# Altium PCB PowerFK2.PcbDoc
Units mm, origin at the board's own origin, x right, y up, seen from the top; angles counter-clockwise.
Board outline 152.4 x 101.6 mm, 2 copper layers (Top Layer, Bottom Layer); 31 components, 21 nets, 89 pads, 0 vias.
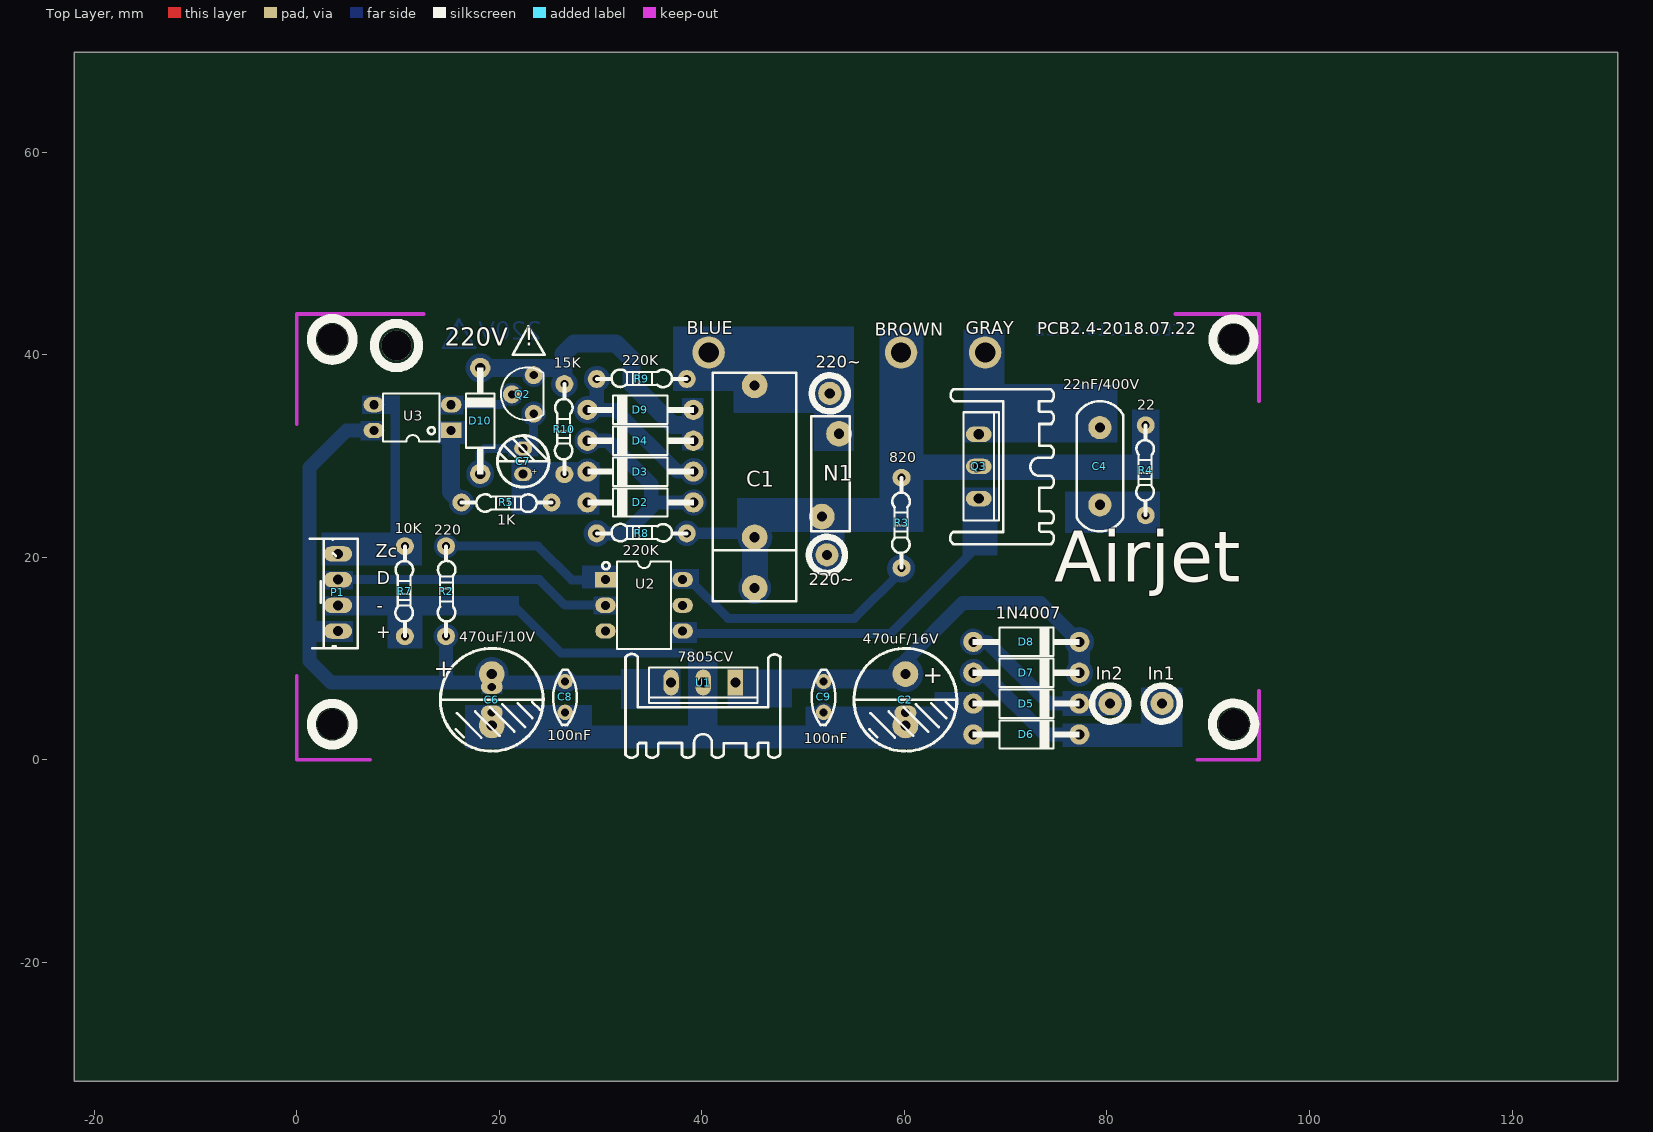
[diagram p0: Top Layer view]
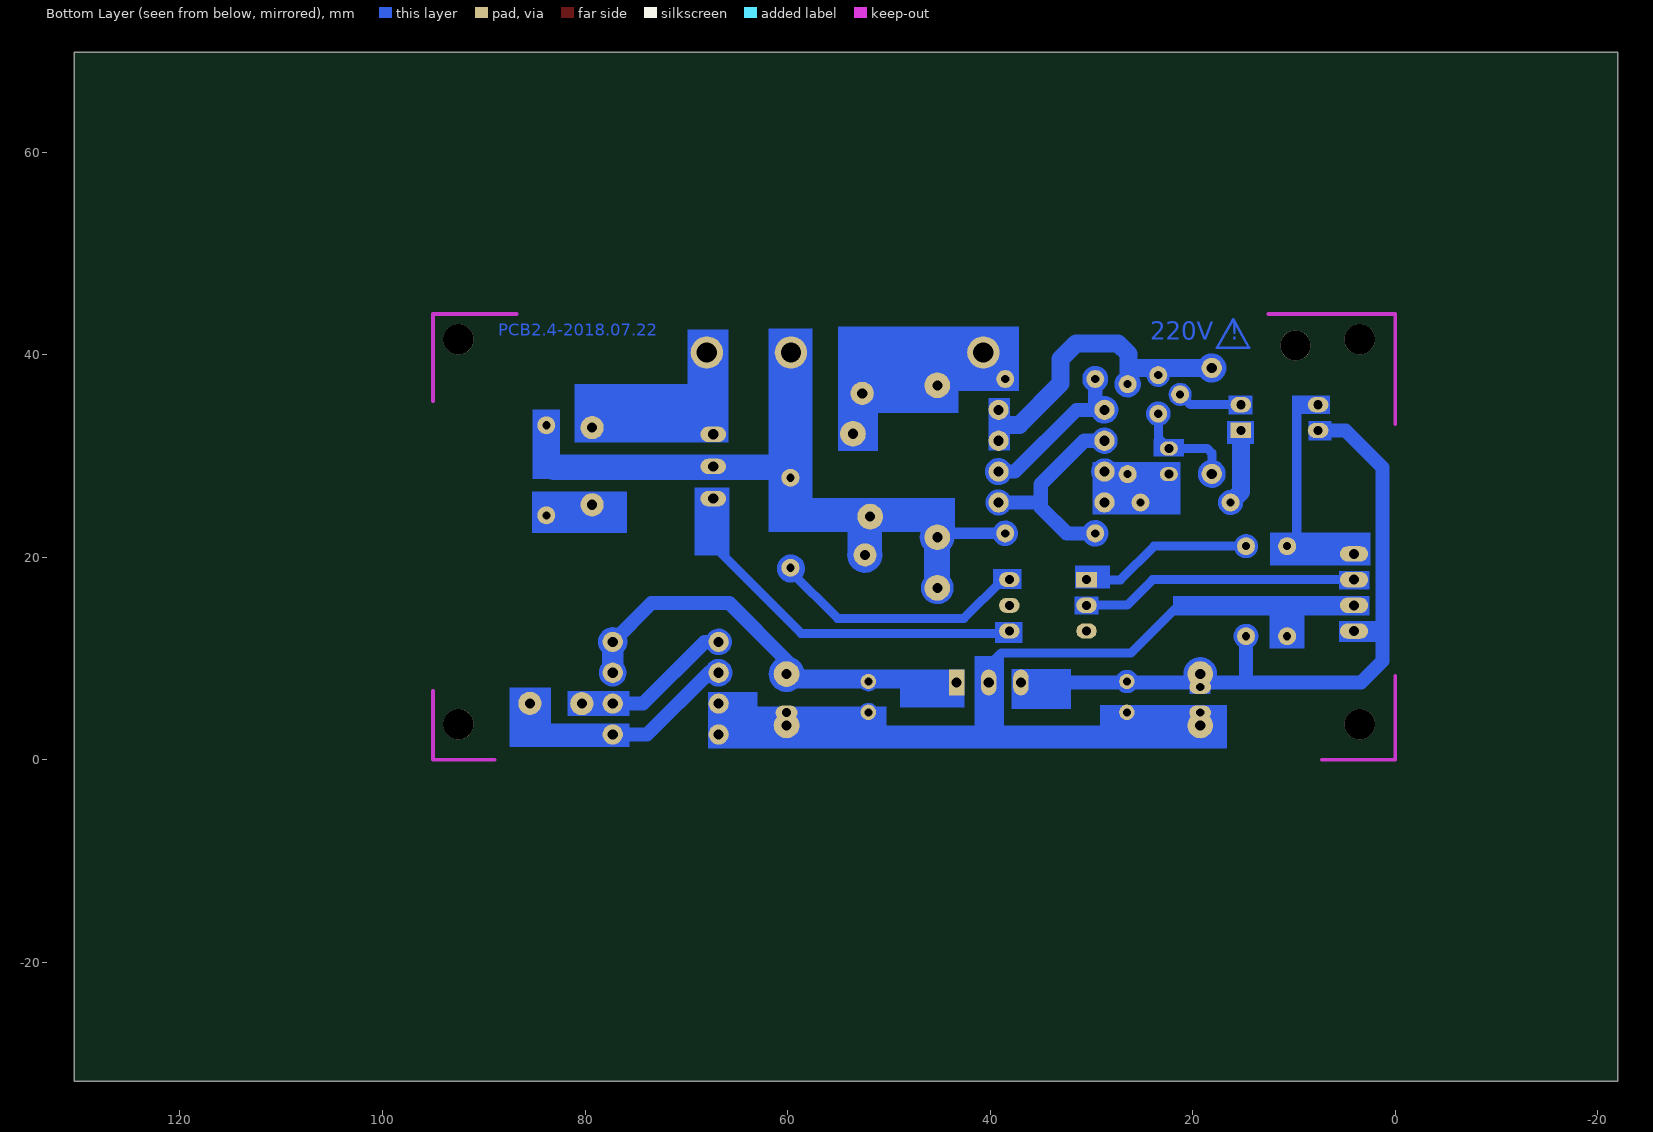
[diagram p1: Bottom Layer view, seen from below]

## Layer stack, top to bottom
Top Solder: solder mask 0.0102, Solder Resist, Dk 3.5
Top Layer: signal copper 0.0356
Dielectric1: dielectric 0.32, FR-4, Dk 4.8
Bottom Layer: signal copper 0.0356
Bottom Solder: solder mask 0.0102, Solder Resist, Dk 3.5

## Board outline
-21.971,-31.75 130.429,-31.75 130.429,69.85 -21.971,69.85

## Design rules (kind name [scope] priority, off if disabled: settings)
Clearance [All] p1: gap=0.254
FabricationTestPointUsage TestPointUsage [All] p1: valid=0 allowmultiple=FALSE
FabricationTestpoint Testpoint [All] p1: side=3 testpointundercomponent=TRUE minsize=1.016 maxsize=2.54 preferedsize=1.524 minholesize=0 maxholesize=1.016 preferedholesize=0.813 testpointgrid=0.025 allowsidetop=TRUE allowsidebottom=TRUE usegrid=TRUE gridtolerance=0
PolygonConnect [All] p1: connectstyle=Relief reliefconductorwidth=0.254 reliefentries=4 polygonreliefangle="90 Angle" airgapwidth=0.254
RoutingVias [All] p1: holewidth=0.711 width=1.27 viastyle="Through Hole" minholewidth=0.711 minwidth=1.27 maxholewidth=0.711 maxwidth=1.27
SolderMaskExpansion [All] p1: expansion=0.102
Width [All] p1: maxlimit=5.08 minlimit=0.254 preferedwidth=0.889 toplayer_maxwidth=0.254 toplayer_prefwidth=0.254 minimp=50.000000 maximp=50.000000 favimp=50.000000
27 further rules are at their usual default settings.

## Components (designator, comment, footprint, x,y, rotation, side; value= is the part's Value field where it differs from the comment)
C1 "220nF/300V" Cap15-20 45.212,29.464 r270 top
C2 "470uF/16V" RB.2/.4 60.096,8.458 r270 top
C4 "22nF/400V" Cap10 79.299,28.981 r270 top
C6 "470uF/10V" RB.2/.4 19.253,8.458 r270 top (schematic designator C2)
C7 "10uF/50V" RB.1/.2 22.352,29.464 r90 top
C8 "100nF" RAD0.12 26.492,4.674 r90 top (schematic designator C3)
C9 "100nF" RAD0.12 52.019,4.674 r90 top (schematic designator C3)
D2 "1N4007" DIODE0.4 33.934,25.4 r180 top
D3 "1N4007" DIODE0.4 33.934,28.448 r180 top
D4 "1N4007" DIODE0.4 33.934,31.496 r180 top
D5 "1N4007" DIODE0.4 72.034,5.537 r0 top (schematic designator D1)
D6 "1N4007" DIODE0.4 72.034,2.489 r0 top (schematic designator D2)
D7 "1N4007" DIODE0.4 72.034,8.585 r0 top (schematic designator D3)
D8 "1N4007" DIODE0.4 72.034,11.633 r0 top (schematic designator D4)
D9 "1N4007" DIODE0.4 33.934,34.544 r180 top
D10 "1N4007" DIODE0.4 18.11,33.452 r90 top
N1 "10D471K" VARISTOR-10MIL 51.841,24.003 r90 top
P1 "Header 4" CON4 4.064,12.7 r0 top
Q2 "C945" TO92BS2 22.758,36.068 r270 top
Q3 "Triac" TO-220HS28#1 67.335,28.956 r270 top
R2 "220" RES0.35 14.732,12.192 r90 top
R3 "820" RES0.35 59.715,27.838 r270 top
R4 "22" RES0.35 83.82,33.02 r270 top
R5 "1K" RES0.35 16.256,25.4 r0 top
R7 "10K" RES0.35 10.668,21.082 r270 top
R8 "220K" RES0.35 38.506,22.352 r180 top
R9 "220K" RES0.35 38.506,37.592 r180 top
R10 "15K" RES0.35 26.416,37.084 r270 top
U1 "7805CV" TO-220HS28#2 40.132,7.62 r180 top (schematic designator Q2)
U2 "MOC3021" DIP6 30.48,17.78 r270 top
U3 "PC817" DIP4-OPTO 15.24,32.512 r90 top

## Footprints (in the part's own frame and the unit in brackets; to place one, negate y for a bottom-side part, rotate by r counter-clockwise, add the part's x,y. Pads: shape width x height; smd on the part's side, far side on the other; paste and mask are expansions set on the pad)
Cap10 [mil]
  round 90 hole 39.37: 1(-150,0) 2(150,0)
  silkscreen extent -253,-91 254,91
Cap15-20 [mm]
  round 2.54 hole 1: 1(7.5,0) 1(12.5,0) 2(-7.5,0)
  silkscreen extent -8.76,-4.14 13.82,4.11
CON4 [mil] "100mil between pins"
  oval 110x60 hole 39.37: 1(0,0) 2(0,100) 3(0,200) 4(0,300)
  silkscreen extent -110,-67 77,358
DIODE0.4 [mm] "Diode, Axial; Body 5.2 x 2.7 mm (LxDia. max), Lead Dia. 0.86 mm (max)"
  round 2 hole 1: 1(-5.23,0) 2(5.23,0)
  silkscreen extent -5.3,-1.4 5.25,1.4
DIP4-OPTO [mm] "DIP; 4 Leads; Row Spacing 7.62 mm; Pitch 2.54 mm"
  rect 1.524x2.032 hole 0.9: 1(0,0)
  oval 1.524x2.032 hole 0.9: 2(2.54,0)
  oval 1.5x2.032 hole 0.9: 3(2.54,7.62) 4(0,7.62)
  silkscreen extent -1.1,1.16 3.63,6.73
DIP6 [mm] "DIP; 6 Leads; Row Spacing 7.62 mm; Pitch 2.54 mm"
  rect 1.524x2.032 hole 0.9: 1(0,0)
  oval 1.524x2.032 hole 0.9: 2(2.54,0)
  oval 1.5x2.032 hole 0.9: 3(5.08,0) 4(5.08,7.62) 5(2.54,7.62) 6(0,7.62)
  silkscreen extent -1.78,-0.3 6.86,6.46
RAD0.12 [mil]
  round 60 hole 31.5: 1(0,0) 2(120,0)
  silkscreen extent -49,-45 166,46
RB.1/.2 [mil]
  oval 55x70 hole 35.43: 1(-50,0) 2(50,0)
  silkscreen extent -100,-100 100,100
RB.2/.4 [mm]
  round 2.54 hole 1: 1(0,0) 2(5.08,0)
  silkscreen extent -2.54,-5.08 7.62,5.08
RES0.35 [mil] "Diode, Axial; Body 5.2 x 2.7 mm (LxDia. max), Lead Dia. 0.86 mm (max)"
  round 70 hole 31.5: 1(0,0)
  round 70 hole 31.5 paste+0: 2(350,0)
  silkscreen extent 0,-37 350,32
TO92BS2 [mil] "NPN-CC5551,C945 Base Side"
  round 70 hole 31.5: 1(-75,25) 2(0,-60) 3(75,25)
  silkscreen extent -105,-102 100,63
TO-220HS28#1 [mm] "MOSFET-IRF4905- Z46n"
  oval 1.524x2.54 hole 1: 1(-3.175,0) 2(0,0) 3(3.175,0)
  silkscreen extent -7.63,-2.82 7.68,7.42
TO-220HS28#2 [mm] "MOSFET-IRF4905- Z46n"
  rect 1.524x2.54 hole 1: 1(-3.175,0)
  oval 1.524x2.54 hole 1: 2(0,0) 3(3.175,0)
  silkscreen extent -7.63,-2.82 7.68,7.42
VARISTOR-10MIL [mm]
  round 2.54 hole 1: 1(0,0) 2(8.179,-1.702)
  silkscreen extent -1.43,-2.77 9.91,1.04

## Part data
C1: library part CAP, "Capacitor"
C2 C6: library part "Cap Pol1", "Polarized Capacitor (SMD)"
C4: library part Cap, "Capacitor"
C7: library part "Cap Pol", "Polarized Capacitor"
C8 C9: library part Cap, "Capacitor np"
D2 D3 D4 D9 D10: library part Diode
D5 D6 D7 D8: library part Diode, "1 Amp General Purpose Rectifier"
N1: library part "Res Varistor", "Varistor (Voltage-Sensitive Resistor)"
P1: "Header, 4-Pin"
Q2 U1: library part BC337, "NPN General Purpose Amplifier"
Q3: "Silicon Bidirectional Triode Thyristor"
R2 R3 R4 R5 R7 R8 R9 R10: library part Resistor, "Resistor"
U2: library part "Opto TRIAC_1", "Opto-Triac"
U3: library part Optoisolator1, "4-Pin Phototransistor Optocoupler"

## Free pads (board coordinates)
  oval 2.159x1.397 hole 0.9: 0(60.096,4.648)
  oval 2.159x1.397 hole 0.8: 1(19.253,4.648) 1(19.253,7.188)
  round 3 hole 3: 6(92.5,41.5) 7(3.5,3.5) 7(3.5,41.5) 7(9.85,40.894) 8(92.5,3.5)
  round 3.2 hole 2: 13(40.665,40.208) 13(59.665,40.208) 13(67.97,40.208)
  round 2.286 hole 1: 14(52.349,20.218) 14(52.629,36.17) 14(80.315,5.537) 14(85.446,5.563)

## Nets (pads, with @x,y where several pads share a name; then routed paths per layer and width w, separated by ;. In a path a pad name is that pad's centre, name@x,y a point inside that pad or via, vN(x,y) a via of type N, cw(c..) or ccw(c..) an arc to the next point about the centre after c; other vN are vias at no path point)
220V: C1.1 N1.1 pad.13@59.665,40.208 pad.14@52.349,20.218 Q3.2 R3.1 R4.1 R8.1 | length 70.3
  Bottom Layer w0.889: C1.1@44.806,22.86 C1.1@44.933,22.987 ; 83.82,29.642 R4.1 ; R8.1@39.32,22.352 ccw(c38.506,22.352) R8.1@39.32,22.352 ; C1.1@46.376,16.964 ccw(c45.212,16.964) C1.1@46.376,16.964 ; 46.507,21.971 ccw(c45.237,21.971) 46.507,21.971 ; 53.67,20.193 ccw(c52.375,20.193) 53.67,20.193
  Bottom Layer w1.143: R8.1 C1.1@44.78,22.352
  Bottom Layer w2.54: C1.1@45.237,16.964 C1.1@45.237,21.92 ; 47.32,24.003 N1.1 ; 60.655,28.88 83.083,28.88
+5V: C6.1 C8.2 P1.1 pad.1@19.253,7.188 R2.1 U1.3 U3.4 | length 96.1
  Bottom Layer w0.635: 15.639,12.192 ccw(c14.732,12.192) 15.639,12.192 ; 20.608,8.458 ccw(c19.253,8.458) 20.608,8.458 ; 27.33,7.722 ccw(c26.492,7.722) 27.33,7.722
  Bottom Layer w0.889: 1.676,12.751 1.727,12.7 ; P1.1@3.759,12.751 P1.1@3.81,12.7 ; C6.1@19.66,7.798 C8.2@26.137,7.798
  Bottom Layer w1.397: 1.676,12.751 P1.1@3.759,12.751 ; U3.4 4.902,32.512 1.245,28.854 1.245,9.754 3.378,7.62 U1.3 ; 14.732,7.874 R2.1
+VREL: C2.1 C9.2 D7.2 D8.2 U1.1 | length 67.5
  Bottom Layer w0.254: 52.867,7.722 ccw(c52.019,7.722) 52.867,7.722
  Bottom Layer w0.635: 61.546,8.458 ccw(c60.096,8.458) 61.546,8.458
  Bottom Layer w0.889: C2.1 60.096,9.804 ; D7.2@78.179,8.585 ccw(c77.264,8.585) D7.2@78.179,8.585 ; 78.271,11.633 ccw(c77.264,11.633) 78.271,11.633
  Bottom Layer w1.397: 60.096,9.804 65.761,15.469 73.429,15.469 D8.2
  Bottom Layer w1.905: U1.1@43.663,7.976 C2.1@59.207,7.976
  Bottom Layer w2.159: D7.2 D8.2
DIMOUT: P1.3 U2.2 | length 27.7
  Bottom Layer w0.889: P1.3@3.81,17.78 23.952,17.78 26.467,15.265 U2.2@30.48,15.265
GND: C2.2 C6.2 C8.1 C9.1 D5.1 D6.1 P1.2 pad.0 pad.1@19.253,4.648 R7.2 U1.2 | length 113.9
  Bottom Layer w0.254: 52.838,4.674 ccw(c52.019,4.674) 52.838,4.674
  Bottom Layer w0.889: P1.2@3.556,15.24 P1.2 10.668,15.24 ; R7.2@10.668,12.446 10.668,15.24 ; C6.2@19.66,2.718 26.137,2.718 ; 26.492,2.362 35.839,2.362 ; 36.144,2.667 35.839,2.362 ; 40.056,2.642 40.132,2.718 40.132,9.296 38.887,10.541 26.086,10.541 21.387,15.24 10.668,15.24 ; 43.028,2.362 52.984,2.362 ; D5.1 66.804,2.542 66.624,2.362 52.984,2.362 ; 35.839,2.362 52.984,2.362
IN1: D6.2 D7.1 pad.14@85.446,5.563 | length 18.7
  Bottom Layer w0.889: D7.1@67.72,8.585 ccw(c66.804,8.585) D7.1@67.72,8.585
  Bottom Layer w1.397: D7.1 67.767,8.585 73.863,2.489 D6.2
IN2: D5.2 D8.1 pad.14@80.315,5.537 | length 18.4
  Bottom Layer w0.889: D8.1@67.668,11.633 ccw(c66.804,11.633) D8.1@67.668,11.633
  Bottom Layer w1.397: D8.1 68.174,11.633 74.27,5.537 D5.2
MOTOR2: C4.1 pad.13@67.97,40.208 Q3.1
NetC4_2: C4.2 R4.2
NetC7_1: C7.1 D2.2 D3.2 R5.2 R10.2 | length 5.4
  Bottom Layer w0.889: D3.2@29.568,28.448 ccw(c28.704,28.448) D3.2@29.568,28.448
NetC7_2: C7.2 D10.1 Q2.3 | length 21
  Bottom Layer w0.889: D10.1 18.11,30.279 18.565,30.734 C7.2 23.393,31.775 Q2.3 ; D10.1@19.048,28.222 ccw(c18.11,28.222) D10.1@19.048,28.222 ; Q2.3@24.157,34.163 ccw(c23.393,34.163) Q2.3@24.157,34.163
NetD2_1: D2.1 D4.2 R8.2 | length 40.7
  Bottom Layer w0.889: D4.2@29.557,31.496 ccw(c28.704,31.496) D4.2@29.557,31.496 ; R8.2@30.476,22.352 ccw(c29.616,22.352) R8.2@30.476,22.352 ; D2.1@39.85,25.4 ccw(c39.164,25.4) D2.1@39.85,25.4 ; D2.1@40.003,25.4 ccw(c39.164,25.4) D2.1@40.003,25.4
  Bottom Layer w1.397: D4.2 30.709,31.496 35.001,27.203 35.001,24.917 32.436,22.352 R8.2 ; 35.56,25.4 D2.1
NetD3_1: D3.1 D9.2 R9.2 | length 32.4
  Bottom Layer w0.889: D9.2@29.622,34.544 ccw(c28.704,34.544) D9.2@29.622,34.544 ; R9.2@30.456,37.592 ccw(c29.616,37.592) R9.2@30.456,37.592 ; D3.1@40.054,28.448 ccw(c39.164,28.448) D3.1@40.054,28.448
  Bottom Layer w1.397: D9.2 31.471,34.544 37.567,28.448 D3.1 ; D9.2@29.616,34.823 R9.2
NetD4_1: D4.1 D9.1 D10.2 Q2.1 R10.1 | length 46.5
  Bottom Layer w0.889: D10.2@19.104,38.682 ccw(c18.11,38.682) D10.2@19.104,38.682 ; Q2.1@24.103,37.973 ccw(c23.393,37.973) Q2.1@24.103,37.973 ; R10.1@27.286,37.084 ccw(c26.416,37.084) R10.1@27.286,37.084
  Bottom Layer w1.778: D10.2 26.185,38.682 26.314,38.552 ; R10.1@26.314,37.592 26.314,38.552 ; D4.1 39.164,33.071 37.109,33.071 33.045,37.135 33.045,39.573 31.521,41.097 27.356,41.097 26.314,40.056 26.314,38.552
NetQ2_2: Q2.2 U3.2 | length 10.7
  Bottom Layer w0.889: U3.2 20.218,35.052 Q2.2 ; Q2.2@21.92,36.068 ccw(c21.234,36.068) Q2.2@21.92,36.068
NetQ3_3: Q3.3 U2.4 | length 36.6
  Bottom Layer w0.889: U2.4@38.913,12.471 58.649,12.471 67.335,21.158 Q3.3
NetR2_2: R2.2 U2.1 | length 26.4
  Bottom Layer w0.889: R2.2 23.8,21.082 27.127,17.755 U2.1@30.48,17.755 ; R2.2@15.469,21.082 ccw(c14.732,21.082) 13.995,21.082 ccw(c14.732,21.082) R2.2@15.469,21.082 ; R2.2@15.469,21.082 ccw(c14.732,21.082) R2.2@15.469,21.082
NetR3_2: R3.2 U2.6 | length 31
  Bottom Layer w0.889: U2.6 38.76,17.78 42.596,13.945 55.067,13.945 R3.2@59.715,18.593 ; 60.606,18.872 ccw(c59.665,18.872) 60.606,18.872
NetR5_1: R5.1 U3.1 | length 12.1
  Bottom Layer w0.889: R5.1@17.047,25.4 ccw(c16.256,25.4) R5.1@17.047,25.4
  Bottom Layer w1.778: U3.1@15.24,32.106 15.24,26.416 R5.1
NULL: C1.2 N1.2 pad.13@40.665,40.208 pad.14@52.629,36.17 R9.1
ZEROC: P1.4 R7.1 U3.3 | length 27.9
  Bottom Layer w0.889: P1.4@3.556,20.345 8.915,20.345 9.677,21.107 9.677,34.392 9.017,35.052 U3.3 ; 9.677,22.073 R7.1 ; R7.1@11.38,21.082 ccw(c10.668,21.082) R7.1@11.38,21.082
pads on no net: U2.3 U2.5
copper on no net: | length 9.6
  Bottom Layer w0.254: 15.993,43.491 14.438,40.666 17.588,40.666 ; 15.994,43.467 17.6,40.667

## Keep-outs
Keep-Out Layer:
  lines w0.381: 0,8.255 0,0 7.239,0 ; 0,33.122 0,44 12.522,44 ; 86.741,44 95,44 95,35.433 ; 88.925,0 95,0 95,6.807

## Other copper
Bottom Layer:
  rectangle net ZEROC: 6.452,34.138 9.677,35.966
  rectangle net NetQ2_2: 14.072,34.061 16.485,35.941
  rectangle net NetD4_1: 38.024,30.531 40.183,35.712
  rectangle net NetQ3_3: 65.735,20.168 69.164,26.899
  rectangle net GND: 38.633,3.251 41.529,10.262
  rectangle net GND: 16.586,3.378 29.159,5.41
  rectangle net GND: 16.586,1.118 50.216,3.378
  rectangle net GND: 50.216,1.118 62.967,5.258
  rectangle net GND: 62.967,1.118 67.869,6.706
  rectangle net IN1: 75.59,1.245 87.122,3.581
  rectangle net IN1: 83.363,1.245 87.478,7.112
  rectangle net IN2: 75.616,4.293 81.712,6.782
  rectangle net 220V: 82.448,27.711 85.192,34.595
  rectangle net NetC4_2: 75.87,22.377 85.217,26.467
  rectangle net NULL: 37.16,36.424 55.016,42.799
  rectangle net NULL: 43.104,34.239 55.016,36.754
  rectangle net MOTOR2: 65.811,31.318 69.875,42.494
  rectangle net 220V: 57.531,22.504 61.874,42.57
  region net NetC7_1: 29.896,29.388 21.209,29.388 21.209,24.232 29.896,24.232
  rectangle net MOTOR2: 65.811,31.318 81.026,37.109
  rectangle net +5V: 1.676,11.633 5.563,13.691
  rectangle net GND: 2.54,14.224 21.946,16.18
  rectangle net DIMOUT: 2.515,16.815 5.563,18.644
  rectangle net ZEROC: 2.438,19.177 12.37,22.428
  rectangle net +5V: 32.004,5.029 37.897,8.941
  rectangle net +VREL: 42.545,5.156 48.895,8.915
  rectangle net NetC7_2: 20.853,29.947 23.851,31.674
  rectangle net GND: 8.941,10.973 12.395,15.24
  rectangle net NetQ3_3: 36.779,11.506 39.497,13.614
  rectangle net NetR2_2: 28.143,16.916 31.623,19.152
  rectangle net NetR3_2: 36.906,16.843 39.697,18.821
  rectangle net NetR5_1: 13.919,31.191 16.586,33.426
  rectangle net ZEROC: 9.677,22.123 10.211,35.966
  rectangle net DIMOUT: 29.286,14.326 31.648,16.129
  rectangle net +5V: 6.299,31.521 8.585,33.426
  rectangle net +5V: 18.237,6.477 20.295,7.01
  rectangle net NULL: 51.079,30.48 55.016,34.239
  rectangle net 220V: 43.485,22.504 57.531,25.857
  rectangle net 220V: 50.673,20.523 54.102,22.86
  text "PCB2.4-2018.07.22" at 88.57,41.478 h2.03
  text "220V  !" at 24.2,40.878 h3.05

## Silkscreen, mask and mechanical layers (free items; w line width, h text height)
Top Overlay:
  circle w0.635: c52.629,36.17 r1.783
  circle w0.635: c52.349,20.218 r1.783
  circle w0.889: c9.85,40.894 r2.185
  circle w0.889: c3.5,41.5 r2.058
  circle w0.889: c3.5,3.5 r2.059
  circle w0.889: c92.5,3.5 r2.092
  circle w0.889: c92.5,41.5 r2.031
  circle w0.635: c85.416,5.537 r1.783
  circle w0.635: c80.31,5.537 r1.783
  lines w0.254: 22.872,42.79 21.317,39.965 24.467,39.965 ; 22.873,42.766 24.479,39.965
  text "BLUE" at 38.506,41.986 h1.27
  text "GRAY" at 66.065,41.986 h1.27
  text "BROWN" at 57.074,41.885 h1.27
  text "PCB2.4-2018.07.22" at 73.101,41.605 h2.03
  text "220V  !" at 14.629,40.277 h3.05
  text "220~" at 51.257,38.329 h2.03
  text "Zc" at 7.772,19.99 h1.27
  text "D" at 7.899,17.348 h1.27
  text "220~" at 50.546,16.84 h2.03
  text "Airjet" at 74.803,15.875 h8.64
  text "-" at 7.899,14.605 h1.27
  text "1N4007" at 69.037,13.538 h2.03
  text "+" at 7.823,11.989 h1.27
  text "+" at 13.538,8.204 h1.78
  text "In2" at 78.892,7.899 h1.27
  text "In1" at 84.049,7.899 h1.27
  text "+" at 61.798,7.569 h1.78

## Text inside footprints (layer, text, board x,y; h text height)
C7: Top Overlay "+" at 23.876,28.092 h1 r90